# Altium PCB panel_board.PcbDoc
Units mm, origin at the board's own origin, x right, y up, seen from the top; angles counter-clockwise.
Board outline 6.5 x 33 mm, 2 copper layers (Top Layer, Bottom Layer); 5 components, 4 nets, 16 pads, 4 vias.
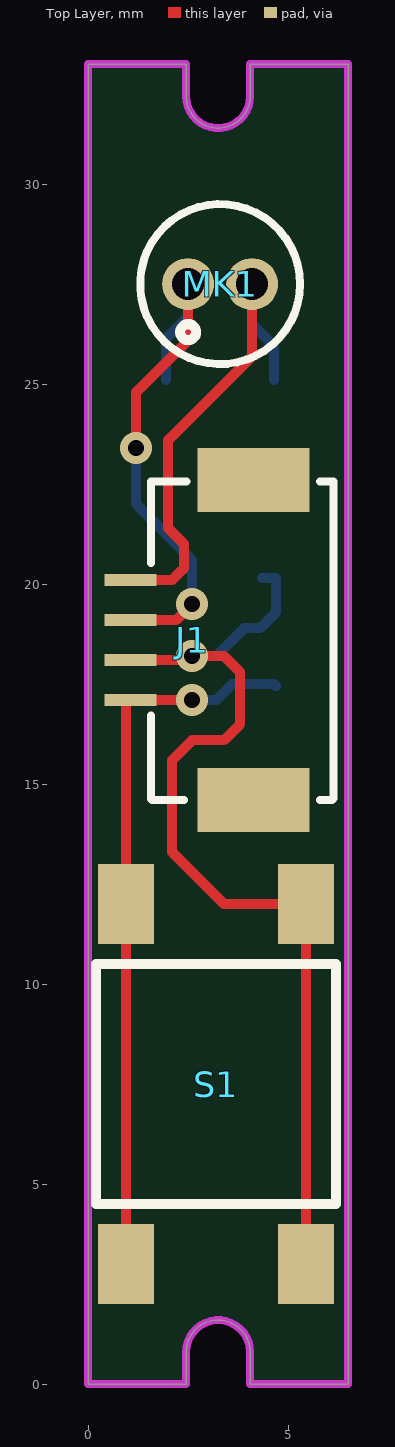
[diagram p0: Top Layer view]
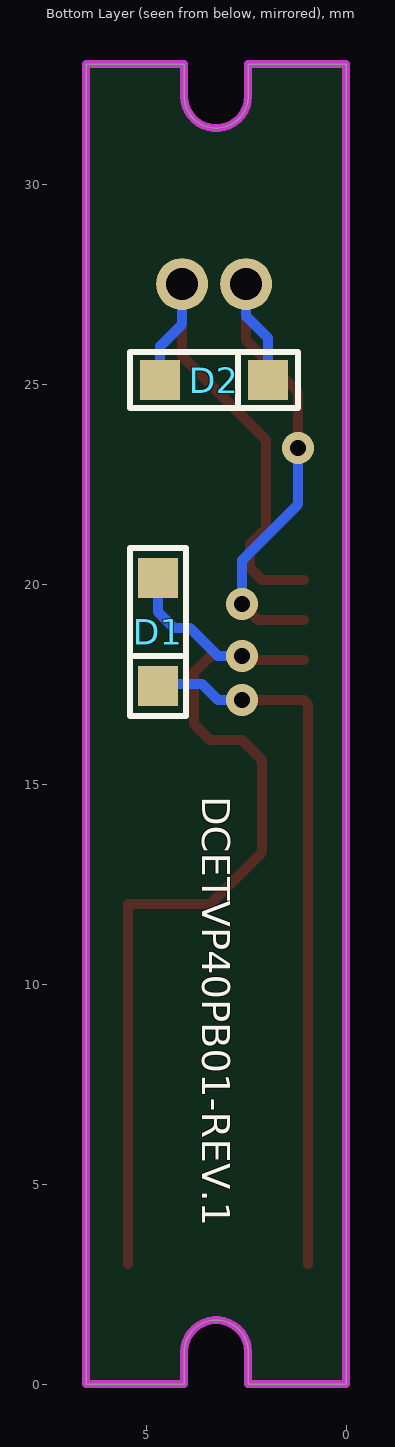
[diagram p1: Bottom Layer view, seen from below]

## Layer stack, top to bottom
Top Solder: solder mask 0.0102, Solder Resist, Dk 3.5
Top Layer: signal copper 0.0356
Dielectric 1: dielectric 0.32, FR-4, Dk 4.8
Bottom Layer: signal copper 0.0356
Bottom Solder: solder mask 0.0102, Solder Resist, Dk 3.5

## Board outline
0,0 0,33 2.45,33 2.45,32.2 ccw(c3.25,32.2) 4.05,32.2 4.05,33 6.5,33 6.5,0 4.05,0 4.05,0.8 ccw(c3.25,0.8) 2.45,0.8 2.45,0

## Design rules (kind name [scope] priority, off if disabled: settings)
Clearance [All] p1: gap=0.254
PolygonConnect [All] p1: connectstyle=Relief reliefconductorwidth=0.254 reliefentries=4 polygonreliefangle="90 Angle" airgapwidth=0.254
RoutingVias [All] p1: holewidth=0.711 width=1.27 viastyle="Through Hole" minholewidth=0.711 minwidth=1.27 maxholewidth=0.711 maxwidth=1.27
SolderMaskExpansion [All] p1: expansion=0.102
Width [All] p1: maxlimit=0.254 minlimit=0.254 preferedwidth=0.254
30 further rules are at their usual default settings.

## Components (designator, comment, footprint, x,y, rotation, side; value= is the part's Value field where it differs from the comment)
D1 "PESD5V0L1BA" SOD323 4.7,18.8 r270 bottom
D2 "PESD5V0L1BA" SOD323 3.3,25.1 r180 bottom
J1 "MIC & RST-PB" FPC1.0-DR-SMD-4P-F2.0 2.6,18.6 r270 top locked
MK1 "Mic2" MIC4015 3.3,27.5 r0 top locked
S1 "SW-PB" SW-PB-SMD 3.2,7.5 r90 top locked

## Footprints (in the part's own frame and the unit in brackets; to place one, negate y for a bottom-side part, rotate by r counter-clockwise, add the part's x,y. Pads: shape width x height; smd on the part's side, far side on the other; paste and mask are expansions set on the pad)
FPC1.0-DR-SMD-4P-F2.0 [mm]
  rect 0.3x1.3 smd: 1(1.5,-1.54) 2(0.5,-1.54) 3(-0.5,-1.54) 4(-1.5,-1.54)
  rect 1.6x2.8 smd: ""(-4,1.54) ""(4,1.54)
  silkscreen extent -3.96,-1.03 4,3.54
MIC4015 [mm]
  round 1.3 hole 0.8: 1(-0.8,0) 2(0.8,0)
  silkscreen extent -2,-2 2,2
SOD323 [mm]
  rect 1x1 smd: 1(-1.35,0) 2(1.35,0)
  silkscreen extent -2.1,-0.7 2.1,0.7
SW-PB-SMD [mm]
  rect 2x1.4 smd: 1(-4.5,2.25) 1(4.5,2.25) 2(-4.5,-2.25) 2(4.5,-2.25)
  silkscreen extent -3,-3 3,3

## Part data
D1 D2: library part PESD
J1: library part "Header 4", "Header, 4-Pin"
MK1: "Microphone"
S1: "Switch"

## Via types
v1: diameter 0.8, hole 0.4, Top Layer to Bottom Layer, tented both sides, 4 vias

## Nets (pads, with @x,y where several pads share a name; then routed paths per layer and width w, separated by ;. In a path a pad name is that pad's centre, name@x,y a point inside that pad or via, vN(x,y) a via of type N, cw(c..) or ccw(c..) an arc to the next point about the centre after c; other vN are vias at no path point)
MICIN: D2.2 J1.3 MK1.1 | length 13.5
  Top Layer w0.254: J1.3 2.2,19.1 v1(2.6,19.5) ; v1(1.2,23.4) 1.2,24.8 2.5,26.1 MK1.1
  Bottom Layer w0.254: v1(1.2,23.4) 1.2,22 2.6,20.6 v1(2.6,19.5) ; D2.2 1.95,26.15 2.5,26.7 MK1.1
MR: D1.2 J1.1 S1.1 | length 17.7
  Top Layer w0.254: S1.1@0.95,3 0.95,12 0.95,16.99 J1.1 v1@2.3,17.1
  Bottom Layer w0.254: v1(2.6,17.1) 3.2,17.1 3.6,17.5 4.65,17.5 D1.2
NetD1_1: D1.1 J1.2 S1.2 | length 25.2
  Top Layer w0.254: J1.2 v1@2.6,18.1 ; v1(2.6,18.2) 3.4,18.2 3.8,17.8 3.8,16.5 3.4,16.1 2.6,16.1 2.1,15.6 2.1,13.3 3.4,12 5.45,12 S1.2@5.45,3
  Bottom Layer w0.254: v1(2.6,18.2) 3.2,18.2 3.9,18.9 4.3,18.9 4.7,19.3 D1.1 D1.1@4.35,20.15
NetD2_1: D2.1 J1.4 MK1.2 | length 12.2
  Top Layer w0.254: J1.4 2.096,20.1 2.277,20.281 2.281,20.281 2.4,20.4 2.4,21 2,21.4 2,23.6 4.1,25.7 MK1.2
  Bottom Layer w0.254: MK1.2 4.1,26.5 4.65,25.95 D2.1
pads on no net: J1.

## Keep-outs
Keep-Out Layer:
  the board outline again, w0.2

## Silkscreen, mask and mechanical layers (free items; w line width, h text height)
Bottom Overlay:
  text "DCETVP40PB01-REV.1" at 3.6,14.7 h0.7 r90